# Altium PCB AX309.REV.1.0.PcbDoc (part 9 of 10)
Units mil, origin at the board's own origin, x right, y up, seen from the top; angles counter-clockwise.
Board outline 5185 x 3614 mil, 4 copper layers (Top Layer, GND, Mid-Layer 1, Bottom Layer); 191 components, 352 nets, 1106 pads, 425 vias.
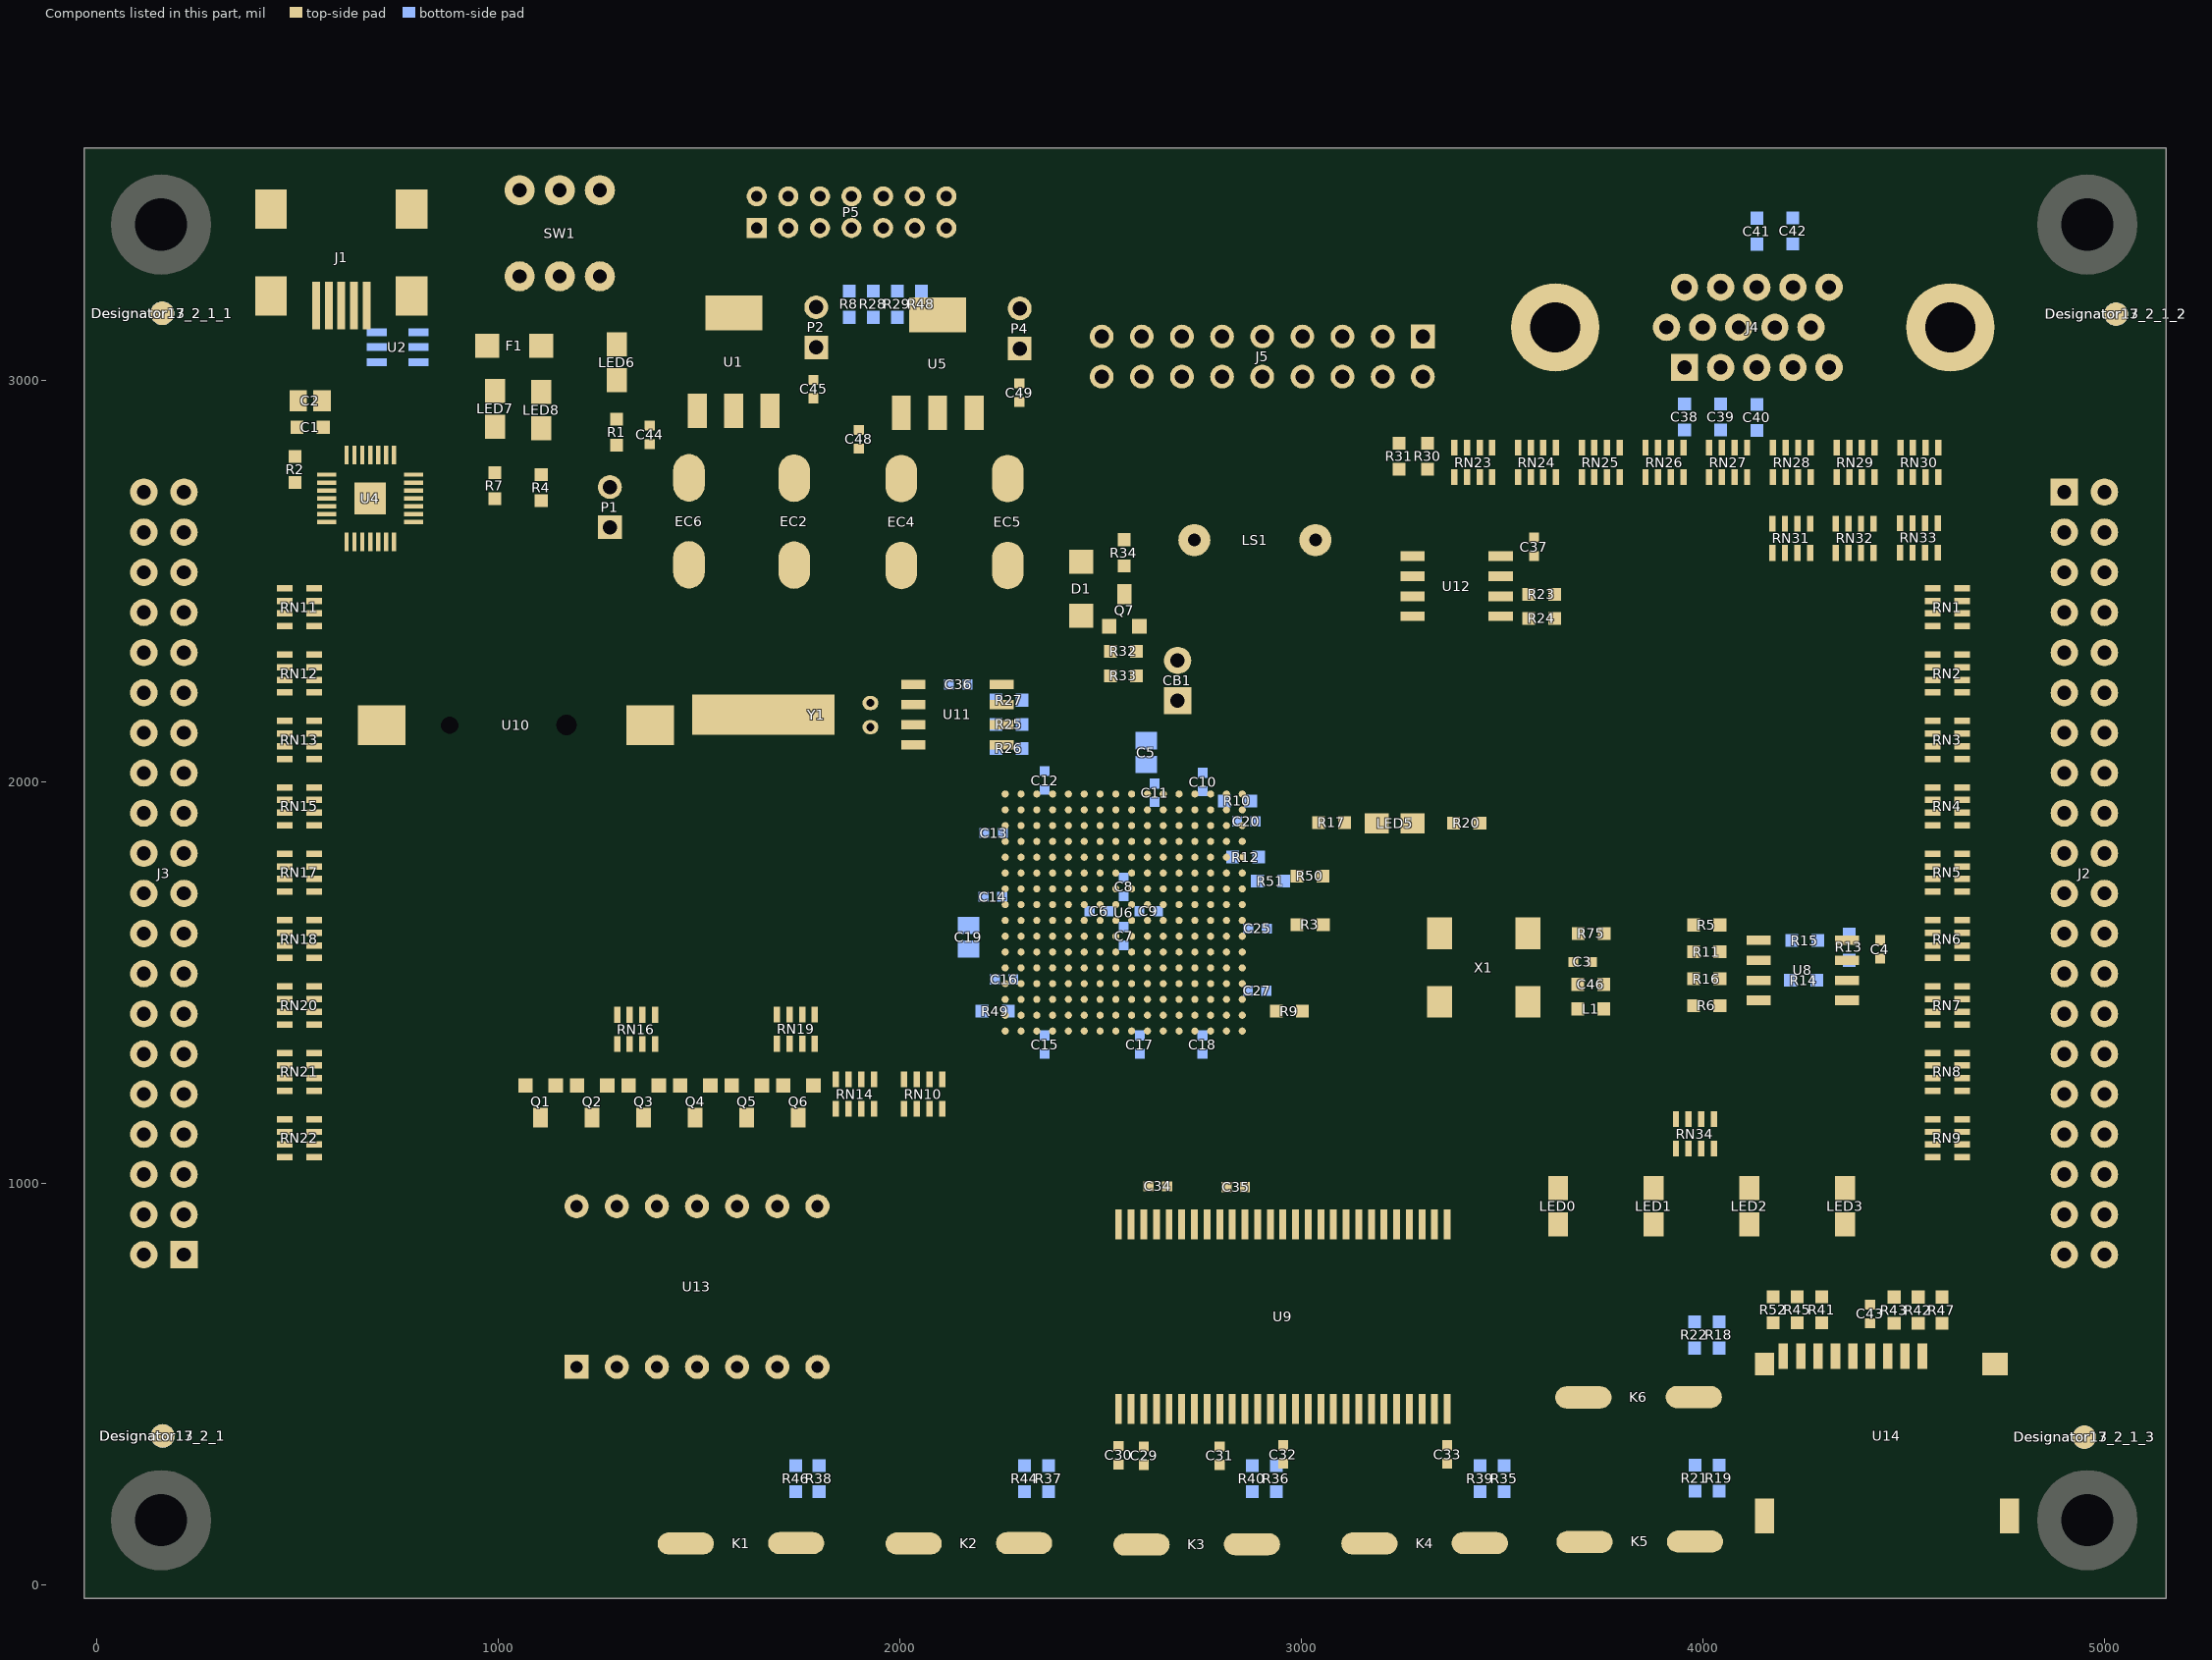
[diagram p11: the components of this part, seen from the top]

## Via types
v1: diameter 20, hole 10, Top Layer to Bottom Layer, 328 vias
v2: diameter 30, hole 15, Top Layer to Bottom Layer, 95 vias
v3: diameter 40, hole 20, Top Layer to Bottom Layer, 2 vias

## Nets (pads, with @x,y where several pads share a name; then routed paths per layer and width w, separated by ;. In a path a pad name is that pad's centre, name@x,y a point inside that pad or via, vN(x,y) a via of type N, cw(c..) or ccw(c..) an arc to the next point about the centre after c; other vN are vias at no path point) (continued)
copper on no net: (continued)
  Top Layer w0.7: 323.5,59.9 386.03,59.9 ; 323.5,60.6 386.03,60.6 ; 324.2,61.3 386.73,61.3 ; 324.2,62 387.43,62 ; 324.9,62.7 387.43,62.7 ; 324.9,63.4 388.13,63.4 ; 325.6,64.1 388.13,64.1 ; 325.6,64.8 388.83,64.8 ; 326.3,65.5 389.53,65.5 ; 326.3,66.2 389.53,66.2 ; 327,66.9 390.23,66.9 ; 327,67.6 390.93,67.6 ; 327.7,68.3 390.93,68.3 ; 327.7,69 391.63,69 ; 328.4,69.7 392.33,69.7 ; 329.1,70.4 393.03,70.4 ; 329.1,71.1 393.03,71.1 ; 329.8,71.8 393.73,71.8 ; 329.8,72.5 394.43,72.5 ; 330.5,73.2 395.13,73.2 ; 331.2,73.9 395.83,73.9 ; 331.2,74.6 395.83,74.6 ; 331.9,75.3 396.53,75.3 ; 331.9,76 397.23,76 ; 332.6,76.7 397.93,76.7 ; 333.3,77.4 398.63,77.4 ; 333.3,78.1 399.33,78.1 ; 334,78.8 400.03,78.8 ; 334.7,79.5 400.73,79.5 ; 335.4,80.2 400.73,80.2 ; 335.4,80.9 401.43,80.9 ; 336.1,81.6 402.13,81.6 ; 336.8,82.3 402.83,82.3 ; 336.8,83 403.53,83 ; 337.5,83.7 404.23,83.7 ; 338.2,84.4 404.93,84.4 ; 338.9,85.1 405.63,85.1 ; 338.9,85.8 407.03,85.8 ; 339.6,86.5 407.73,86.5 ; 340.3,87.2 408.43,87.2 ; 341,87.9 409.13,87.9 ; 341.7,88.6 409.83,88.6 ; 341.7,89.3 410.53,89.3 ; 342.4,90 411.23,90 ; 343.1,90.7 412.63,90.7 ; 343.8,91.4 413.33,91.4 ; 344.5,92.1 414.03,92.1 ; 345.2,92.8 414.73,92.8 ; 345.9,93.5 416.13,93.5 ; 345.9,94.2 416.83,94.2 ; 346.6,94.9 417.53,94.9 ; 347.3,95.6 418.93,95.6 ; 348,96.3 419.63,96.3 ; 348.7,97 421.03,97 ; 349.4,97.7 421.73,97.7 ; 350.1,98.4 423.13,98.4 ; 350.8,99.1 423.83,99.1 ; 351.5,99.8 425.23,99.8 ; 352.2,100.5 426.63,100.5 ; 352.9,101.2 427.33,101.2 ; 353.6,101.9 428.73,101.9 ; 354.3,102.6 430.13,102.6 ; 355,103.3 431.53,103.3 ; 355.7,104 432.23,104 ; 356.4,104.7 433.63,104.7 ; 357.1,105.4 435.03,105.4 ; 357.1,118.7 357.33,118.7 ; 357.8,106.1 436.43,106.1 ; 357.8,119.4 358.03,119.4 ; 357.8,120.1 359.43,120.1 ; 358.5,106.8 438.53,106.8 ; 358.5,120.8 360.13,120.8 ; 358.5,121.5 360.83,121.5 ; 359.2,122.2 361.53,122.2 ; 359.9,107.5 439.93,107.5 ; 359.9,122.9 362.23,122.9 ; 359.9,123.6 362.93,123.6 ; 360.6,108.2 441.33,108.2 ; 360.6,124.3 364.33,124.3 ; 360.6,125 365.03,125 ; 361.3,108.9 443.43,108.9 ; 361.3,125.7 365.73,125.7 ; 361.3,126.4 367.13,126.4 ; 362,109.6 444.83,109.6 ; 362,127.1 367.83,127.1 ; 362,127.8 368.53,127.8 ; 362.7,110.3 446.93,110.3 ; 362.7,128.5 369.93,128.5 ; 363.4,129.2 370.63,129.2 ; 363.4,129.9 371.33,129.9 ; 364.1,111 449.03,111 ; 364.1,130.6 372.73,130.6 ; 364.1,131.3 373.43,131.3 ; 364.8,111.7 451.13,111.7 ; 364.8,132 374.83,132 ; 364.8,132.7 375.53,132.7 ; 365.5,112.4 451.13,112.4 ; 365.5,133.4 376.93,133.4 ; 366.2,113.1 451.13,113.1 ; 366.2,134.1 377.63,134.1 ; 366.2,134.8 379.03,134.8 ; 366.9,135.5 380.43,135.5 ; 366.9,136.2 381.13,136.2 ; 367.6,113.8 451.13,113.8 ; 367.6,136.9 382.53,136.9 ; 367.6,137.6 383.93,137.6 ; 368.3,114.5 451.13,114.5 ; 368.3,138.3 384.63,138.3 ; 369,115.2 451.13,115.2 ; 369,139 386.03,139 ; 369,139.7 387.43,139.7 ; 369.7,140.4 388.83,140.4 ; 369.7,141.1 390.23,141.1 ; 370.4,115.9 451.13,115.9 ; 370.4,141.8 391.63,141.8 ; 370.4,142.5 393.03,142.5 ; 371.1,116.6 450.43,116.6 ; 371.1,143.2 394.43,143.2 ; 371.1,143.9 395.83,143.9 ; 371.8,117.3 450.43,117.3 ; 371.8,144.6 397.23,144.6 ; 372.5,145.3 399.33,145.3 ; 372.5,146 400.73,146 ; 373.2,118 450.43,118 ; 373.2,146.7 402.83,146.7 ; 373.2,147.4 404.23,147.4 ; 373.9,118.7 450.43,118.7 ; 373.9,148.1 406.33,148.1 ; 373.9,148.8 408.43,148.8 ; 374.6,149.5 409.83,149.5 ; 375.3,119.4 450.43,119.4 ; 375.3,150.2 412.63,150.2 ; 375.3,150.9 414.73,150.9 ; 376,120.1 450.43,120.1 ; 376,151.6 416.83,151.6 ; 376,152.3 419.63,152.3 ; 376.7,153 422.43,153 ; 376.7,153.7 425.23,153.7 ; 377.4,120.8 450.43,120.8 ; 377.4,154.4 428.73,154.4 ; 378.1,121.5 450.43,121.5 ; 378.1,155.1 430.83,155.1 ; 378.1,155.8 430.83,155.8 ; 378.8,156.5 431.53,156.5 ; 378.8,157.2 431.53,157.2 ; 379.5,122.2 450.43,122.2 ; 379.5,157.9 432.23,157.9 ; 379.5,158.6 432.23,158.6 ; 380.2,159.3 432.93,159.3 ; 380.2,160 432.93,160 ; 380.9,122.9 450.43,122.9 ; 380.9,160.7 432.93,160.7 ; 381.6,123.6 450.43,123.6 ; 381.6,161.4 433.63,161.4 ; 381.6,162.1 433.63,162.1 ; 382.3,162.8 434.33,162.8 ; 382.3,163.5 434.33,163.5 ; 383,124.3 450.43,124.3 ; 383,164.2 435.03,164.2 ; 383,164.9 435.03,164.9 ; 383.7,165.6 435.73,165.6 ; 384.4,125 450.43,125 ; 384.4,166.3 435.73,166.3 ; 384.4,167 436.43,167 ; 385.1,125.7 449.73,125.7 ; 385.1,167.7 436.43,167.7 ; 385.1,168.4 437.13,168.4 ; 385.8,169.1 437.13,169.1 ; 385.8,169.8 437.83,169.8 ; 386.5,126.4 449.73,126.4 ; 386.5,170.5 437.83,170.5 ; 387.2,171.2 438.53,171.2 ; 387.2,171.9 438.53,171.9 ; 387.9,127.1 449.73,127.1 ; 387.9,172.6 438.53,172.6 ; 387.9,173.3 439.23,173.3 ; 388.6,174 439.23,174 ; 388.6,174.7 439.93,174.7 ; 389.3,127.8 449.73,127.8 ; 389.3,175.4 439.93,175.4 ; 389.3,176.1 440.63,176.1 ; 390,176.8 440.63,176.8 ; 390.7,128.5 449.73,128.5 ; 390.7,177.5 441.33,177.5 ; 390.7,178.2 441.33,178.2 ; 391.4,178.9 442.03,178.9 ; 391.4,179.6 442.03,179.6 ; 392.1,129.2 449.73,129.2 ; 392.1,180.3 442.73,180.3 ; 392.1,181 442.73,181 ; 392.8,181.7 443.43,181.7 ; 393.5,129.9 449.73,129.9 ; 393.5,182.4 443.43,182.4 ; 393.5,183.1 444.13,183.1 ; 394.2,183.8 444.13,183.8 ; 394.2,184.5 444.83,184.5 ; 394.9,130.6 449.73,130.6 ; 394.9,185.2 444.83,185.2 ; 394.9,185.9 444.83,185.9 ; 395.6,186.6 445.53,186.6 ; 395.6,187.3 445.53,187.3 ; 396.3,131.3 449.73,131.3 ; 396.3,188 446.23,188 ; 397,188.7 446.23,188.7 ; 397,189.4 446.93,189.4 ; 397.7,132 449.73,132 ; 397.7,190.1 446.93,190.1 ; 397.7,190.8 447.63,190.8 ; 398.4,191.5 447.63,191.5 ; 398.4,192.2 448.33,192.2 ; 399.1,132.7 449.73,132.7 ; 399.1,192.9 448.33,192.9 ; 399.8,193.6 449.03,193.6 ; 399.8,194.3 449.03,194.3 ; 400.5,133.4 449.73,133.4 ; 400.5,195 449.73,195 ; 400.5,195.7 449.73,195.7 ; 401.2,196.4 450.43,196.4 ; 401.2,197.1 450.43,197.1 ; 401.9,197.8 497.33,197.8 ; 402.6,134.1 449.73,134.1 ; 402.6,198.5 497.33,198.5 ; 402.6,199.2 497.33,199.2 ; 403.3,199.9 497.33,199.9 ; 403.3,200.6 497.33,200.6 ; 404,134.8 449.73,134.8 ; 404,201.3 496.63,201.3 ; 404,202 496.63,202 ; 404.7,202.7 496.63,202.7 ; 404.7,203.4 496.63,203.4 ; 405.4,204.1 496.63,204.1 ; 406.1,135.5 449.03,135.5 ; 406.1,204.8 496.63,204.8 ; 406.1,205.5 495.93,205.5 ; 406.8,206.2 495.93,206.2 ; 406.8,206.9 495.93,206.9 ; 407.5,207.6 495.93,207.6 ; 407.5,208.3 495.93,208.3 ; 408.2,136.2 449.03,136.2 ; 408.2,209 495.93,209 ; 408.9,209.7 495.23,209.7 ; 408.9,210.4 495.23,210.4 ; 409.6,136.9 449.03,136.9 ; 409.6,211.1 495.23,211.1 ; 409.6,211.8 495.23,211.8 ; 410.3,212.5 495.23,212.5 ; 410.3,213.2 495.23,213.2 ; 411,213.9 494.53,213.9 ; 411.7,137.6 449.03,137.6 ; 411.7,214.6 494.53,214.6 ; 411.7,215.3 494.53,215.3 ; 412.4,216 494.53,216 ; 412.4,216.7 494.53,216.7 ; 413.1,217.4 494.53,217.4 ; 413.1,218.1 494.53,218.1 ; 413.8,138.3 449.03,138.3 ; 413.8,218.8 493.83,218.8 ; 413.8,219.5 493.83,219.5 ; 414.5,220.2 493.83,220.2 ; 415.2,220.9 493.83,220.9 ; 415.2,221.6 493.83,221.6 ; 415.9,139 449.03,139 ; 415.9,222.3 493.83,222.3 ; 415.9,223 493.13,223 ; 416.6,223.7 493.13,223.7 ; 416.6,224.4 493.13,224.4 ; 417.3,225.1 493.13,225.1 ; 418,225.8 493.13,225.8 ; 418,226.5 493.13,226.5 ; 418.7,139.7 449.03,139.7 ; 418.7,227.2 492.43,227.2 ; 418.7,227.9 492.43,227.9 ; 419.4,228.6 492.43,228.6 ; 419.4,229.3 492.43,229.3 ; 420.1,230 492.43,230 ; 420.1,230.7 492.43,230.7 ; 420.8,140.4 449.03,140.4 ; 420.8,231.4 492.43,231.4 ; 421.5,232.1 491.73,232.1 ; 421.5,232.8 491.73,232.8 ; 422.2,233.5 491.73,233.5 ; 422.2,234.2 491.73,234.2 ; 422.9,234.9 491.73,234.9 ; 422.9,235.6 491.73,235.6 ; 423.6,141.1 449.03,141.1 ; 423.6,236.3 491.03,236.3 ; 424.3,237 491.03,237 ; 424.3,237.7 491.03,237.7 ; 425,238.4 491.03,238.4 ; 425,239.1 491.03,239.1 ; 425.7,239.8 491.03,239.8 ; 425.7,240.5 490.33,240.5 ; 426.4,141.8 449.03,141.8 ; 426.4,241.2 490.33,241.2 ; 427.1,241.9 490.33,241.9 ; 427.1,242.6 490.33,242.6 ; 427.8,243.3 490.33,243.3 ; 427.8,244 490.33,244 ; 428.5,244.7 489.63,244.7 ; 428.5,245.4 489.63,245.4 ; 429.9,142.5 449.03,142.5 ; 433.4,143.2 449.03,143.2 ; 437.6,143.9 449.03,143.9 ; 442.5,144.6 448.33,144.6 ; 451.6,193.6 498.03,193.6 ; 451.6,194.3 498.03,194.3 ; 451.6,195 498.03,195 ; 451.6,195.7 498.03,195.7 ; 451.6,196.4 497.33,196.4 ; 451.6,197.1 497.33,197.1 ; 452.3,185.2 499.43,185.2 ; 452.3,185.9 499.43,185.9 ; 452.3,186.6 499.43,186.6 ; 452.3,187.3 499.43,187.3 ; 452.3,188 498.73,188 ; 452.3,188.7 498.73,188.7 ; 452.3,189.4 498.73,189.4 ; 452.3,190.1 498.73,190.1 ; 452.3,190.8 498.73,190.8 ; 452.3,191.5 498.73,191.5 ; 452.3,192.2 498.03,192.2 ; 452.3,192.9 498.03,192.9 ; 453,176.8 500.83,176.8 ; 453,177.5 500.83,177.5 ; 453,178.2 500.83,178.2 ; 453,178.9 500.13,178.9 ; 453,179.6 500.13,179.6 ; 453,180.3 500.13,180.3 ; 453,181 500.13,181 ; 453,181.7 500.13,181.7 ; 453,182.4 500.13,182.4 ; 453,183.1 499.43,183.1 ; 453,183.8 499.43,183.8 ; 453,184.5 499.43,184.5 ; 453.7,169.1 502.23,169.1 ; 453.7,169.8 502.23,169.8 ; 453.7,170.5 501.53,170.5 ; 453.7,171.2 501.53,171.2 ; 453.7,171.9 501.53,171.9 ; 453.7,172.6 501.53,172.6 ; 453.7,173.3 501.53,173.3 ; 453.7,174 501.53,174 ; 453.7,174.7 500.83,174.7 ; 453.7,175.4 500.83,175.4 ; 453.7,176.1 500.83,176.1 ; 454.4,160.7 503.63,160.7 ; 454.4,161.4 502.93,161.4 ; 454.4,162.1 502.93,162.1 ; 454.4,162.8 502.93,162.8 ; 454.4,163.5 502.93,163.5 ; 454.4,164.2 502.93,164.2 ; 454.4,164.9 502.93,164.9 ; 454.4,165.6 502.23,165.6 ; 454.4,166.3 502.23,166.3 ; 454.4,167 502.23,167 ; 454.4,167.7 502.23,167.7 ; 454.4,168.4 502.23,168.4 ; 455.1,152.3 504.33,152.3 ; 455.1,153 504.33,153 ; 455.1,153.7 504.33,153.7 ; 455.1,154.4 504.33,154.4 ; 455.1,155.1 504.33,155.1 ; 455.1,155.8 504.33,155.8 ; 455.1,156.5 504.33,156.5 ; 455.1,157.2 503.63,157.2 ; 455.1,157.9 503.63,157.9 ; 455.1,158.6 503.63,158.6 ; 455.1,159.3 503.63,159.3 ; 455.1,160 503.63,160 ; 455.8,144.6 505.73,144.6 ; 455.8,145.3 505.73,145.3 ; 455.8,146 505.73,146 ; 455.8,146.7 505.73,146.7 ; 455.8,147.4 505.73,147.4 ; 455.8,148.1 505.03,148.1 ; 455.8,148.8 505.03,148.8 ; 455.8,149.5 505.03,149.5 ; 455.8,150.2 505.03,150.2 ; 455.8,150.9 505.03,150.9 ; 455.8,151.6 505.03,151.6 ; 456.5,136.2 507.13,136.2 ; 456.5,136.9 507.13,136.9 ; 456.5,137.6 507.13,137.6 ; 456.5,138.3 507.13,138.3 ; 456.5,139 506.43,139 ; 456.5,139.7 506.43,139.7 ; 456.5,140.4 506.43,140.4 ; 456.5,141.1 506.43,141.1 ; 456.5,141.8 506.43,141.8 ; 456.5,142.5 506.43,142.5 ; 456.5,143.2 506.43,143.2 ; 456.5,143.9 505.73,143.9 ; 457.2,128.5 508.53,128.5 ; 457.2,129.2 508.53,129.2 ; 457.2,129.9 508.53,129.9 ; 457.2,130.6 507.83,130.6 ; 457.2,131.3 507.83,131.3 ; 457.2,132 507.83,132 ; 457.2,132.7 507.83,132.7 ; 457.2,133.4 507.83,133.4 ; 457.2,134.1 507.83,134.1 ; 457.2,134.8 507.13,134.8 ; 457.2,135.5 507.13,135.5 ; 457.9,120.1 509.93,120.1 ; 457.9,120.8 509.93,120.8 ; 457.9,121.5 509.23,121.5 ; 457.9,122.2 509.23,122.2 ; 457.9,122.9 509.23,122.9 ; 457.9,123.6 509.23,123.6 ; 457.9,124.3 509.23,124.3 ; 457.9,125 509.23,125 ; 457.9,125.7 509.23,125.7 ; 457.9,126.4 508.53,126.4 ; 457.9,127.1 508.53,127.1 ; 457.9,127.8 508.53,127.8 ; 458.6,112.4 511.33,112.4 ; 458.6,113.1 510.63,113.1 ; 458.6,113.8 510.63,113.8 ; 458.6,114.5 510.63,114.5 ; 458.6,115.2 510.63,115.2 ; 458.6,115.9 510.63,115.9 ; 458.6,116.6 510.63,116.6 ; 458.6,117.3 509.93,117.3 ; 458.6,118 509.93,118 ; 458.6,118.7 509.93,118.7 ; 458.6,119.4 509.93,119.4 ; 459.3,104 512.03,104 ; 459.3,104.7 512.03,104.7 ; 459.3,105.4 512.03,105.4 ; 459.3,106.1 512.03,106.1 ; 459.3,106.8 512.03,106.8 ; 459.3,107.5 512.03,107.5 ; 459.3,108.2 512.03,108.2 ; 459.3,108.9 511.33,108.9 ; 459.3,109.6 511.33,109.6 ; 459.3,110.3 511.33,110.3 ; 459.3,111 511.33,111 ; 459.3,111.7 511.33,111.7 ; 460,96.3 513.43,96.3 ; 460,97 513.43,97 ; 460,97.7 513.43,97.7 ; 460,98.4 513.43,98.4 ; 460,99.1 513.43,99.1 ; 460,99.8 512.73,99.8 ; 460,100.5 512.73,100.5 ; 460,101.2 512.73,101.2 ; 460,101.9 512.73,101.9 ; 460,102.6 512.73,102.6 ; 460,103.3 512.73,103.3 ; 460.7,87.9 514.83,87.9 ; 460.7,88.6 514.83,88.6 ; 460.7,89.3 514.83,89.3 ; 460.7,90 514.83,90 ; 460.7,90.7 514.13,90.7 ; 460.7,91.4 514.13,91.4 ; 460.7,92.1 514.13,92.1 ; 460.7,92.8 514.13,92.8 ; 460.7,93.5 514.13,93.5 ; 460.7,94.2 514.13,94.2 ; 460.7,94.9 514.13,94.9 ; 460.7,95.6 513.43,95.6 ; 461.4,80.2 516.23,80.2 ; 461.4,80.9 516.23,80.9 ; 461.4,81.6 516.23,81.6 ; 461.4,82.3 515.53,82.3 ; 461.4,83 515.53,83 ; 461.4,83.7 515.53,83.7 ; 461.4,84.4 515.53,84.4 ; 461.4,85.1 515.53,85.1 ; 461.4,85.8 515.53,85.8 ; 461.4,86.5 514.83,86.5 ; 461.4,87.2 514.83,87.2 ; 462.1,71.8 517.63,71.8 ; 462.1,72.5 517.63,72.5 ; 462.1,73.2 516.93,73.2 ; 462.1,73.9 516.93,73.9 ; 462.1,74.6 516.93,74.6 ; 462.1,75.3 516.93,75.3 ; 462.1,76 516.93,76 ; 462.1,76.7 516.93,76.7 ; 462.1,77.4 516.93,77.4 ; 462.1,78.1 516.23,78.1 ; 462.1,78.8 516.23,78.8 ; 462.1,79.5 516.23,79.5 ; 462.8,64.1 518.33,64.1 ; 462.8,64.8 518.33,64.8 ; 462.8,65.5 518.33,65.5 ; 462.8,66.2 518.33,66.2 ; 462.8,66.9 518.33,66.9 ; 462.8,67.6 518.33,67.6 ; 462.8,68.3 518.33,68.3 ; 462.8,69 517.63,69 ; 462.8,69.7 517.63,69.7 ; 462.8,70.4 517.63,70.4 ; 462.8,71.1 517.63,71.1 ; 463.5,59.9 519.03,59.9 ; 463.5,60.6 519.03,60.6 ; 463.5,61.3 519.03,61.3 ; 463.5,62 519.03,62 ; 463.5,62.7 519.03,62.7 ; 463.5,63.4 519.03,63.4 ; 558.7,59.9 708.73,59.9 ; 558.7,60.6 708.73,60.6 ; 558.7,61.3 708.73,61.3 ; 559.4,62 708.73,62 ; 559.4,62.7 708.73,62.7 ; 559.4,63.4 709.43,63.4 ; 559.4,64.1 709.43,64.1 ; 559.4,64.8 709.43,64.8 ; 560.1,65.5 709.43,65.5 ; 560.1,66.2 709.43,66.2 ; 560.1,66.9 710.13,66.9 ; 560.1,67.6 710.13,67.6 ; 560.1,68.3 710.13,68.3 ; 560.8,69 710.13,69 ; 560.8,69.7 710.13,69.7 ; 560.8,70.4 710.83,70.4 ; 560.8,71.1 710.83,71.1 ; 561.5,71.8 710.83,71.8 ; 561.5,72.5 710.83,72.5 ; 561.5,73.2 711.53,73.2 ; 561.5,73.9 711.53,73.9 ; 561.5,74.6 711.53,74.6 ; 562.2,75.3 711.53,75.3 ; 562.2,76 711.53,76 ; 562.2,76.7 712.23,76.7 ; 562.2,77.4 712.23,77.4 ; 562.2,78.1 712.23,78.1 ; 562.9,78.8 712.23,78.8 ; 562.9,79.5 712.23,79.5 ; 562.9,80.2 712.93,80.2 ; 562.9,80.9 712.93,80.9 ; 562.9,81.6 712.93,81.6 ; 563.6,82.3 712.93,82.3 ; 563.6,83 712.93,83 ; 563.6,83.7 713.63,83.7 ; 563.6,84.4 713.63,84.4 ; 564.3,85.1 713.63,85.1 ; 564.3,85.8 713.63,85.8 ; 564.3,86.5 714.33,86.5 ; 564.3,87.2 714.33,87.2 ; 564.3,87.9 714.33,87.9 ; 565,88.6 714.33,88.6 ; 565,89.3 714.33,89.3 ; 565,90 715.03,90 ; 565,90.7 715.03,90.7 ; 565,91.4 715.03,91.4 ; 565.7,92.1 715.03,92.1 ; 565.7,92.8 715.03,92.8 ; 565.7,93.5 715.73,93.5 ; 565.7,94.2 715.73,94.2 ; 566.4,94.9 715.73,94.9 ; 566.4,95.6 715.73,95.6 ; 566.4,96.3 715.73,96.3 ; 566.4,97 716.43,97 ; 566.4,97.7 716.43,97.7 ; 567.1,98.4 716.43,98.4 ; 567.1,99.1 716.43,99.1 ; 567.1,99.8 717.13,99.8 ; 567.1,100.5 717.13,100.5 ; 567.1,101.2 717.13,101.2 ; 567.8,101.9 717.13,101.9 ; 567.8,102.6 717.13,102.6 ; 567.8,103.3 717.83,103.3 ; 567.8,104 717.83,104 ; 567.8,104.7 717.83,104.7 ; 568.5,105.4 625.43,105.4 ; 568.5,106.1 625.43,106.1 ; 568.5,106.8 626.13,106.8 ; 568.5,107.5 626.13,107.5 ; 569.2,108.2 626.13,108.2 ; 569.2,108.9 626.13,108.9 ; 569.2,109.6 626.13,109.6 ; 569.2,110.3 626.83,110.3 ; 569.2,111 626.83,111 ; 569.9,111.7 626.83,111.7 ; 569.9,112.4 626.83,112.4 ; 569.9,113.1 626.83,113.1 ; 569.9,113.8 627.53,113.8 ; 569.9,114.5 627.53,114.5 ; 570.6,115.2 627.53,115.2 ; 570.6,115.9 627.53,115.9 ; 570.6,116.6 628.23,116.6 ; 570.6,117.3 628.23,117.3 ; 570.6,118 628.23,118 ; 571.3,118.7 628.23,118.7 ; 571.3,119.4 628.23,119.4 ; 571.3,120.1 628.93,120.1 ; 571.3,120.8 628.93,120.8 ; 572,121.5 628.93,121.5 ; 572,122.2 628.93,122.2 ; 572,122.9 628.93,122.9 ; 572,123.6 629.63,123.6 ; 572,124.3 629.63,124.3 ; 572.7,125 629.63,125 ; 572.7,125.7 629.63,125.7 ; 572.7,126.4 630.33,126.4 ; 572.7,127.1 630.33,127.1 ; 572.7,127.8 630.33,127.8 ; 573.4,128.5 630.33,128.5 ; 573.4,129.2 630.33,129.2 ; 573.4,129.9 631.03,129.9 ; 573.4,130.6 631.03,130.6 ; 574.1,131.3 631.03,131.3 ; 574.1,132 631.03,132 ; 574.1,132.7 631.03,132.7 ; 574.1,133.4 631.73,133.4 ; 574.1,134.1 631.73,134.1 ; 574.8,134.8 631.73,134.8 ; 574.8,135.5 631.73,135.5 ; 574.8,136.2 632.43,136.2 ; 574.8,136.9 632.43,136.9 ; 574.8,137.6 632.43,137.6 ; 575.5,138.3 632.43,138.3 ; 575.5,139 632.43,139 ; 575.5,139.7 633.13,139.7 ; 575.5,140.4 633.13,140.4 ; 576.2,141.1 633.13,141.1 ; 576.2,141.8 633.13,141.8 ; 576.2,142.5 633.13,142.5 ; 576.2,143.2 633.83,143.2 ; 576.2,143.9 633.83,143.9 ; 576.9,144.6 633.83,144.6 ; 576.9,145.3 633.83,145.3 ; 576.9,146 634.53,146 ; 576.9,146.7 634.53,146.7 ; 576.9,147.4 634.53,147.4 ; 577.6,148.1 634.53,148.1 ; 577.6,148.8 634.53,148.8 ; 577.6,149.5 635.23,149.5 ; 577.6,150.2 635.23,150.2 ; 577.6,150.9 635.23,150.9 ; 578.3,151.6 635.23,151.6 ; 578.3,152.3 635.23,152.3 ; 578.3,153 635.93,153 ; 578.3,153.7 635.93,153.7 ; 579,154.4 635.93,154.4 ; 579,155.1 635.93,155.1 ; 579,155.8 636.63,155.8 ; 579,156.5 636.63,156.5 ; 579,157.2 636.63,157.2 ; 579.7,157.9 636.63,157.9 ; 579.7,158.6 636.63,158.6 ; 579.7,159.3 637.33,159.3 ; 579.7,160 637.33,160 ; 579.7,160.7 637.33,160.7 ; 580.4,161.4 637.33,161.4 ; 580.4,162.1 637.33,162.1 ; 580.4,162.8 638.03,162.8 ; 580.4,163.5 638.03,163.5 ; 580.4,164.2 638.03,164.2 ; 581.1,164.9 638.03,164.9 ; 581.1,165.6 638.73,165.6 ; 581.1,166.3 638.73,166.3 ; 581.1,167 638.73,167 ; 581.8,167.7 638.73,167.7 ; 581.8,168.4 638.73,168.4 ; 581.8,169.1 639.43,169.1 ; 581.8,169.8 639.43,169.8 ; 581.8,170.5 639.43,170.5 ; 582.5,171.2 639.43,171.2 ; 582.5,171.9 639.43,171.9 ; 582.5,172.6 640.13,172.6 ; 582.5,173.3 640.13,173.3 ; 582.5,174 640.13,174 ; 583.2,174.7 640.13,174.7 ; 583.2,175.4 640.83,175.4 ; 583.2,176.1 640.83,176.1 ; 583.2,176.8 640.83,176.8 ; 583.9,177.5 640.83,177.5 ; 583.9,178.2 640.83,178.2 ; 583.9,178.9 641.53,178.9 ; 583.9,179.6 641.53,179.6 ; 583.9,180.3 641.53,180.3 ; 584.6,181 641.53,181 ; 584.6,181.7 641.53,181.7 ; 584.6,182.4 642.23,182.4 ; 584.6,183.1 642.23,183.1 ; 584.6,183.8 642.23,183.8 ; 585.3,184.5 642.23,184.5 ; 585.3,185.2 642.93,185.2 ; 585.3,185.9 642.93,185.9 ; 585.3,186.6 642.93,186.6 ; 586,187.3 642.93,187.3 ; 586,188 642.93,188 ; 586,188.7 643.63,188.7 ; 586,189.4 643.63,189.4 ; 586,190.1 643.63,190.1 ; 586.7,190.8 643.63,190.8 ; 586.7,191.5 643.63,191.5 ; 586.7,192.2 644.33,192.2 ; 586.7,192.9 644.33,192.9 ; 586.7,193.6 644.33,193.6 ; 587.4,194.3 644.33,194.3 ; 587.4,195 645.03,195 ; 587.4,195.7 645.03,195.7 ; 587.4,196.4 645.03,196.4 ; 587.4,197.1 645.03,197.1 ; 588.1,197.8 645.03,197.8 ; 588.1,198.5 645.73,198.5 ; 588.1,199.2 645.73,199.2 ; 588.1,199.9 645.73,199.9 ; 588.8,200.6 645.73,200.6 ; 588.8,201.3 645.73,201.3 ; 588.8,202 646.43,202 ; 588.8,202.7 646.43,202.7 ; 588.8,203.4 646.43,203.4 ; 589.5,204.1 646.43,204.1 ; 589.5,204.8 647.13,204.8 ; 589.5,205.5 647.13,205.5 ; 589.5,206.2 647.13,206.2 ; 589.5,206.9 647.13,206.9 ; 590.2,207.6 647.13,207.6 ; 590.2,208.3 647.83,208.3 ; 590.2,209 647.83,209 ; 590.2,209.7 647.83,209.7 ; 590.2,210.4 647.83,210.4 ; 590.9,211.1 647.83,211.1 ; 590.9,211.8 648.53,211.8 ; 590.9,212.5 648.53,212.5 ; 590.9,213.2 648.53,213.2 ; 591.6,213.9 648.53,213.9 ; 591.6,214.6 649.23,214.6 ; 591.6,215.3 649.23,215.3 ; 591.6,216 649.23,216 ; 591.6,216.7 649.23,216.7 ; 592.3,217.4 649.23,217.4 ; 592.3,218.1 649.93,218.1 ; 592.3,218.8 649.93,218.8 ; 592.3,219.5 649.93,219.5 ; 592.3,220.2 649.93,220.2 ; 593,220.9 649.93,220.9 ; 593,221.6 650.63,221.6 ; 593,222.3 650.63,222.3 ; 593,223 650.63,223 ; 593.7,223.7 650.63,223.7 ; 593.7,224.4 651.33,224.4 ; 593.7,225.1 651.33,225.1 ; 593.7,225.8 651.33,225.8 ; 593.7,226.5 651.33,226.5 ; 594.4,227.2 651.33,227.2 ; 594.4,227.9 652.03,227.9 ; 594.4,228.6 652.03,228.6 ; 594.4,229.3 652.03,229.3 ; 594.4,230 652.03,230 ; 595.1,230.7 652.03,230.7 ; 595.1,231.4 652.73,231.4 ; 595.1,232.1 652.73,232.1 ; 595.1,232.8 652.73,232.8 ; 595.1,233.5 652.73,233.5 ; 595.8,234.2 653.43,234.2 ; 595.8,234.9 653.43,234.9 ; 595.8,235.6 653.43,235.6 ; 595.8,236.3 653.43,236.3 ; 596.5,237 653.43,237 ; 596.5,237.7 654.13,237.7 ; 596.5,238.4 654.13,238.4 ; 596.5,239.1 654.13,239.1 ; 596.5,239.8 654.13,239.8 ; 597.2,240.5 654.83,240.5 ; 597.2,241.2 654.83,241.2 ; 597.2,241.9 654.83,241.9 ; 597.2,242.6 654.83,242.6 ; 597.2,243.3 654.83,243.3 ; 597.9,244 655.53,244 ; 597.9,244.7 655.53,244.7 ; 597.9,245.4 655.53,245.4 ; 752.6,59.9 810.23,59.9 ; 752.6,60.6 810.23,60.6 ; 752.6,61.3 810.23,61.3 ; 752.6,62 810.23,62 ; 752.6,62.7 810.93,62.7 ; 753.3,63.4 810.93,63.4 ; 753.3,64.1 810.93,64.1 ; 753.3,64.8 810.93,64.8 ; 753.3,65.5 811.63,65.5 ; 754,66.2 811.63,66.2 ; 754,66.9 811.63,66.9 ; 754,67.6 811.63,67.6 ; 754,68.3 811.63,68.3 ; 754,69 812.33,69 ; 754.7,69.7 812.33,69.7 ; 754.7,70.4 812.33,70.4 ; 754.7,71.1 812.33,71.1 ; 754.7,71.8 812.33,71.8 ; 754.7,72.5 813.03,72.5 ; 755.4,73.2 813.03,73.2 ; 755.4,73.9 813.03,73.9 ; 755.4,74.6 813.03,74.6 ; 755.4,75.3 813.73,75.3 ; 756.1,76 813.73,76 ; 756.1,76.7 813.73,76.7 ; 756.1,77.4 813.73,77.4 ; 756.1,78.1 813.73,78.1 ; 756.1,78.8 814.43,78.8 ; 756.8,79.5 814.43,79.5 ; 756.8,80.2 814.43,80.2 ; 756.8,80.9 814.43,80.9 ; 756.8,81.6 814.43,81.6 ; 756.8,82.3 815.13,82.3 ; 757.5,83 815.13,83 ; 757.5,83.7 815.13,83.7 ; 757.5,84.4 815.13,84.4 ; 757.5,85.1 815.83,85.1 ; 757.5,85.8 815.83,85.8 ; 758.2,86.5 815.83,86.5 ; 758.2,87.2 815.83,87.2 ; 758.2,87.9 815.83,87.9 ; 758.2,88.6 816.53,88.6 ; 758.9,89.3 816.53,89.3 ; 758.9,90 816.53,90 ; 758.9,90.7 816.53,90.7 ; 758.9,91.4 816.53,91.4 ; 758.9,92.1 817.23,92.1 ; 759.6,92.8 817.23,92.8 ; 759.6,93.5 817.23,93.5 ; 759.6,94.2 817.23,94.2 ; 759.6,94.9 817.93,94.9 ; 759.6,95.6 817.93,95.6 ; 760.3,96.3 817.93,96.3 ; 760.3,97 817.93,97 ; 760.3,97.7 817.93,97.7 ; 760.3,98.4 818.63,98.4 ; 761,99.1 818.63,99.1 ; 761,99.8 818.63,99.8 ; 761,100.5 818.63,100.5 ; 761,101.2 818.63,101.2 ; 761,101.9 819.33,101.9 ; 761.7,102.6 819.33,102.6 ; 761.7,103.3 819.33,103.3 ; 761.7,104 819.33,104 ; 761.7,104.7 819.33,104.7 ; 761.7,105.4 820.03,105.4 ; 762.4,106.1 820.03,106.1 ; 762.4,106.8 820.03,106.8 ; 762.4,107.5 820.03,107.5 ; 762.4,108.2 820.73,108.2 ; 763.1,108.9 820.73,108.9 ; 763.1,109.6 820.73,109.6 ; 763.1,110.3 820.73,110.3 ; 763.1,111 820.73,111 ; 763.1,111.7 821.43,111.7 ; 763.8,112.4 821.43,112.4 ; 763.8,113.1 821.43,113.1 ; 763.8,113.8 821.43,113.8 ; 763.8,114.5 821.43,114.5 ; 763.8,115.2 822.13,115.2 ; 764.5,115.9 822.13,115.9 ; 764.5,116.6 822.13,116.6 ; 764.5,117.3 822.13,117.3 ; 764.5,118 822.83,118 ; 765.2,118.7 822.83,118.7 ; 765.2,119.4 822.83,119.4 ; 765.2,120.1 822.83,120.1 ; 765.2,120.8 822.83,120.8 ; 765.2,121.5 823.53,121.5 ; 765.9,122.2 823.53,122.2 ; 765.9,122.9 823.53,122.9 ; 765.9,123.6 823.53,123.6 ; 765.9,124.3 823.53,124.3 ; 765.9,125 824.23,125 ; 766.6,125.7 824.23,125.7 ; 766.6,126.4 824.23,126.4 ; 766.6,127.1 824.23,127.1 ; 766.6,127.8 824.93,127.8 ; 767.3,128.5 824.93,128.5 ; 767.3,129.2 824.93,129.2 ; 767.3,129.9 824.93,129.9 ; 767.3,130.6 824.93,130.6 ; 767.3,131.3 825.63,131.3 ; 768,132 825.63,132 ; 768,132.7 825.63,132.7 ; 768,133.4 825.63,133.4 ; 768,134.1 826.33,134.1 ; 768,134.8 826.33,134.8 ; 768.7,135.5 826.33,135.5 ; 768.7,136.2 826.33,136.2 ; 768.7,136.9 826.33,136.9 ; 768.7,137.6 827.03,137.6 ; 769.4,138.3 827.03,138.3 ; 769.4,139 827.03,139 ; 769.4,139.7 827.03,139.7 ; 769.4,140.4 827.03,140.4 ; 769.4,141.1 827.73,141.1 ; 770.1,141.8 827.73,141.8 ; 770.1,142.5 827.73,142.5 ; 770.1,143.2 827.73,143.2 ; 770.1,143.9 828.43,143.9 ; 770.1,144.6 828.43,144.6 ; 770.8,145.3 828.43,145.3 ; 770.8,146 828.43,146 ; 770.8,146.7 828.43,146.7 ; 770.8,147.4 829.13,147.4 ; 771.5,148.1 829.13,148.1 ; 771.5,148.8 829.13,148.8 ; 771.5,149.5 829.13,149.5 ; 771.5,150.2 829.13,150.2 ; 771.5,150.9 829.83,150.9 ; 772.2,151.6 829.83,151.6 ; 772.2,152.3 829.83,152.3 ; 772.2,153 829.83,153 ; 772.2,153.7 829.83,153.7 ; 772.2,154.4 830.53,154.4 ; 772.9,155.1 830.53,155.1 ; 772.9,155.8 830.53,155.8 ; 772.9,156.5 830.53,156.5 ; 772.9,157.2 831.23,157.2 ; 773.6,157.9 831.23,157.9 ; 773.6,158.6 831.23,158.6 ; 773.6,159.3 831.23,159.3 ; 773.6,160 831.23,160 ; 773.6,160.7 831.93,160.7 ; 774.3,161.4 831.93,161.4 ; 774.3,162.1 831.93,162.1 ; 774.3,162.8 831.93,162.8 ; 774.3,163.5 831.93,163.5 ; 774.3,164.2 832.63,164.2 ; 775,164.9 832.63,164.9 ; 775,165.6 832.63,165.6 ; 775,166.3 832.63,166.3 ; 775,167 833.33,167 ; 775.7,167.7 833.33,167.7 ; 775.7,168.4 833.33,168.4 ; 775.7,169.1 833.33,169.1 ; 775.7,169.8 833.33,169.8 ; 775.7,170.5 834.03,170.5 ; 776.4,171.2 834.03,171.2 ; 776.4,171.9 834.03,171.9 ; 776.4,172.6 834.03,172.6 ; 776.4,173.3 834.73,173.3 ; 776.4,174 834.73,174 ; 777.1,174.7 834.73,174.7 ; 777.1,175.4 834.73,175.4 ; 777.1,176.1 834.73,176.1 ; 777.1,176.8 835.43,176.8 ; 777.8,177.5 835.43,177.5 ; 777.8,178.2 835.43,178.2 ; 777.8,178.9 835.43,178.9 ; 777.8,179.6 835.43,179.6 ; 777.8,180.3 836.13,180.3 ; 778.5,181 836.13,181 ; 778.5,181.7 836.13,181.7 ; 778.5,182.4 836.13,182.4 ; 778.5,183.1 836.13,183.1 ; 778.5,183.8 836.83,183.8 ; 779.2,184.5 836.83,184.5 ; 779.2,185.2 836.83,185.2 ; 779.2,185.9 836.83,185.9 ; 779.2,186.6 837.53,186.6 ; 779.9,187.3 837.53,187.3 ; 779.9,188 837.53,188 ; 779.9,188.7 837.53,188.7 ; 779.9,189.4 837.53,189.4 ; 779.9,190.1 838.23,190.1 ; 780.6,190.8 838.23,190.8 ; 780.6,191.5 838.23,191.5 ; 780.6,192.2 838.23,192.2 ; 780.6,192.9 838.23,192.9 ; 780.6,193.6 838.93,193.6 ; 781.3,194.3 838.93,194.3 ; 781.3,195 838.93,195 ; 781.3,195.7 838.93,195.7 ; 781.3,196.4 839.63,196.4 ; 782,197.1 839.63,197.1 ; 782,197.8 839.63,197.8 ; 782,198.5 839.63,198.5 ; 782,199.2 839.63,199.2 ; 782,199.9 840.33,199.9 ; 782.7,200.6 840.33,200.6 ; 782.7,201.3 840.33,201.3 ; 782.7,202 840.33,202 ; 782.7,202.7 840.33,202.7 ; 782.7,203.4 841.03,203.4 ; 783.4,204.1 841.03,204.1 ; 783.4,204.8 841.03,204.8 ; 783.4,205.5 841.03,205.5 ; 783.4,206.2 841.73,206.2 ; 784.1,206.9 841.73,206.9 ; 784.1,207.6 841.73,207.6 ; 784.1,208.3 841.73,208.3 ; 784.1,209 841.73,209 ; 784.1,209.7 842.43,209.7 ; 784.8,210.4 842.43,210.4 ; 784.8,211.1 842.43,211.1 ; 784.8,211.8 842.43,211.8 ; 784.8,212.5 843.13,212.5 ; 784.8,213.2 843.13,213.2 ; 785.5,213.9 843.13,213.9 ; 785.5,214.6 843.13,214.6 ; 785.5,215.3 843.13,215.3 ; 785.5,216 843.83,216 ; 786.2,216.7 843.83,216.7 ; 786.2,217.4 843.83,217.4 ; 786.2,218.1 843.83,218.1 ; 786.2,218.8 843.83,218.8 ; 786.2,219.5 844.53,219.5 ; 786.9,220.2 844.53,220.2 ; 786.9,220.9 844.53,220.9 ; 786.9,221.6 844.53,221.6 ; 786.9,222.3 844.53,222.3 ; 786.9,223 845.23,223 ; 787.6,223.7 845.23,223.7 ; 787.6,224.4 845.23,224.4 ; 787.6,225.1 845.23,225.1 ; 787.6,225.8 845.93,225.8 ; 788.3,226.5 845.93,226.5 ; 788.3,227.2 845.93,227.2 ; 788.3,227.9 845.93,227.9 ; 788.3,228.6 845.93,228.6 ; 788.3,229.3 846.63,229.3 ; 789,230 846.63,230 ; 789,230.7 846.63,230.7 ; 789,231.4 846.63,231.4 ; 789,232.1 846.63,232.1 ; 789,232.8 847.33,232.8 ; 789.7,233.5 847.33,233.5 ; 789.7,234.2 847.33,234.2 ; 789.7,234.9 847.33,234.9 ; 789.7,235.6 848.03,235.6 ; 790.4,236.3 848.03,236.3 ; 790.4,237 848.03,237 ; 790.4,237.7 848.03,237.7 ; 790.4,238.4 848.03,238.4 ; 790.4,239.1 848.73,239.1 ; 791.1,239.8 848.73,239.8 ; 791.1,240.5 848.73,240.5 ; 791.1,241.2 848.73,241.2 ; 791.1,241.9 848.73,241.9 ; 791.1,242.6 849.43,242.6 ; 791.8,243.3 849.43,243.3 ; 791.8,244 849.43,244 ; 791.8,244.7 849.43,244.7 ; 791.8,245.4 850.13,245.4 ; 868.1,59.9 921.53,59.9 ; 868.1,60.6 922.23,60.6 ; 868.8,61.3 922.23,61.3 ; 868.8,62 922.23,62 ; 868.8,62.7 922.23,62.7 ; 868.8,63.4 922.23,63.4 ; 868.8,64.1 922.93,64.1 ; 869.5,64.8 922.93,64.8 ; 869.5,65.5 922.93,65.5 ; 869.5,66.2 922.93,66.2 ; 869.5,66.9 923.63,66.9 ; 870.2,67.6 923.63,67.6 ; 870.2,68.3 923.63,68.3 ; 870.2,69 923.63,69 ; 870.2,69.7 923.63,69.7 ; 870.2,70.4 924.33,70.4 ; 870.9,71.1 924.33,71.1 ; 870.9,71.8 924.33,71.8 ; 870.9,72.5 924.33,72.5 ; 870.9,73.2 924.33,73.2 ; 870.9,73.9 925.03,73.9 ; 871.6,74.6 925.03,74.6 ; 871.6,75.3 925.03,75.3 ; 871.6,76 925.03,76 ; 871.6,76.7 925.73,76.7 ; 872.3,77.4 925.73,77.4 ; 872.3,78.1 925.73,78.1 ; 872.3,78.8 925.73,78.8 ; 872.3,79.5 925.73,79.5 ; 872.3,80.2 926.43,80.2 ; 873,80.9 926.43,80.9 ; 873,81.6 926.43,81.6 ; 873,82.3 926.43,82.3 ; 873,83 926.43,83 ; 873,83.7 927.13,83.7 ; 873.7,84.4 927.13,84.4 ; 873.7,85.1 927.13,85.1 ; 873.7,85.8 927.13,85.8 ; 873.7,86.5 927.83,86.5 ; 874.4,87.2 927.83,87.2 ; 874.4,87.9 927.83,87.9 ; 874.4,88.6 927.83,88.6 ; 874.4,89.3 927.83,89.3 ; 874.4,90 928.53,90 ; 875.1,90.7 928.53,90.7 ; 875.1,91.4 928.53,91.4 ; 875.1,92.1 928.53,92.1 ; 875.1,92.8 928.53,92.8 ; 875.1,93.5 929.23,93.5 ; 875.8,94.2 929.23,94.2 ; 875.8,94.9 929.23,94.9 ; 875.8,95.6 929.23,95.6 ; 875.8,96.3 929.93,96.3 ; 876.5,97 929.93,97 ; 876.5,97.7 929.93,97.7 ; 876.5,98.4 929.93,98.4 ; 876.5,99.1 929.93,99.1 ; 876.5,99.8 930.63,99.8 ; 877.2,100.5 930.63,100.5 ; 877.2,101.2 930.63,101.2 ; 877.2,101.9 930.63,101.9 ; 877.2,102.6 930.63,102.6 ; 877.2,103.3 931.33,103.3 ; 877.9,104 931.33,104 ; 877.9,104.7 931.33,104.7 ; 877.9,105.4 931.33,105.4 ; 877.9,106.1 932.03,106.1 ; 878.6,106.8 932.03,106.8 ; 878.6,107.5 932.03,107.5 ; 878.6,108.2 932.03,108.2 ; 878.6,108.9 932.03,108.9 ; 878.6,109.6 932.73,109.6 ; 879.3,110.3 932.73,110.3 ; 879.3,111 932.73,111 ; 879.3,111.7 932.73,111.7 ; 879.3,112.4 932.73,112.4 ; 880,113.1 933.43,113.1 ; 880,113.8 933.43,113.8 ; 880,114.5 933.43,114.5 ; 880,115.2 933.43,115.2 ; 880,115.9 934.13,115.9 ; 880.7,116.6 934.13,116.6 ; 880.7,117.3 934.13,117.3 ; 880.7,118 934.13,118 ; 880.7,118.7 934.13,118.7 ; 880.7,119.4 934.83,119.4 ; 881.4,120.1 934.83,120.1 ; 881.4,120.8 934.83,120.8 ; 881.4,121.5 934.83,121.5 ; 881.4,122.2 934.83,122.2 ; 882.1,122.9 935.53,122.9 ; 882.1,123.6 935.53,123.6 ; 882.1,124.3 935.53,124.3 ; 882.1,125 935.53,125 ; 882.1,125.7 935.53,125.7 ; 882.8,126.4 936.23,126.4 ; 882.8,127.1 936.23,127.1 ; 882.8,127.8 936.23,127.8 ; 882.8,128.5 936.23,128.5 ; 882.8,129.2 936.93,129.2 ; 883.5,129.9 936.93,129.9 ; 883.5,130.6 936.93,130.6 ; 883.5,131.3 936.93,131.3 ; 883.5,132 936.93,132 ; 884.2,132.7 937.63,132.7 ; 884.2,133.4 937.63,133.4 ; 884.2,134.1 937.63,134.1 ; 884.2,134.8 937.63,134.8 ; 884.2,135.5 937.63,135.5 ; 884.9,136.2 938.33,136.2 ; 884.9,136.9 938.33,136.9 ; 884.9,137.6 938.33,137.6 ; 884.9,138.3 938.33,138.3 ; 884.9,139 939.03,139 ; 885.6,139.7 939.03,139.7 ; 885.6,140.4 939.03,140.4 ; 885.6,141.1 939.03,141.1 ; 885.6,141.8 939.03,141.8 ; 886.3,142.5 939.73,142.5 ; 886.3,143.2 939.73,143.2 ; 886.3,143.9 939.73,143.9 ; 886.3,144.6 939.73,144.6 ; 886.3,145.3 939.73,145.3 ; 887,146 940.43,146 ; 887,146.7 940.43,146.7 ; 887,147.4 940.43,147.4 ; 887,148.1 940.43,148.1 ; 887,148.8 941.13,148.8 ; 887.7,149.5 941.13,149.5 ; 887.7,150.2 941.13,150.2 ; 887.7,150.9 941.13,150.9 ; 887.7,151.6 941.13,151.6 ; 888.4,152.3 941.83,152.3 ; 888.4,153 941.83,153 ; 888.4,153.7 941.83,153.7 ; 888.4,154.4 941.83,154.4 ; 888.4,155.1 941.83,155.1 ; 889.1,155.8 942.53,155.8 ; 889.1,156.5 942.53,156.5 ; 889.1,157.2 942.53,157.2 ; 889.1,157.9 942.53,157.9 ; 889.1,158.6 943.23,158.6 ; 889.8,159.3 943.23,159.3 ; 889.8,160 943.23,160 ; 889.8,160.7 943.23,160.7 ; 889.8,161.4 943.23,161.4 ; 890.5,162.1 943.93,162.1 ; 890.5,162.8 943.93,162.8 ; 890.5,163.5 943.93,163.5 ; 890.5,164.2 943.93,164.2 ; 890.5,164.9 943.93,164.9 ; 891.2,165.6 944.63,165.6 ; 891.2,166.3 944.63,166.3 ; 891.2,167 944.63,167 ; 891.2,167.7 994.33,167.7 ; 891.2,168.4 994.33,168.4 ; 891.9,169.1 993.63,169.1 ; 891.9,169.8 993.63,169.8 ; 891.9,170.5 993.63,170.5 ; 891.9,171.2 992.93,171.2 ; 892.6,171.9 992.93,171.9 ; 892.6,172.6 992.23,172.6 ; 892.6,173.3 992.23,173.3 ; 892.6,174 991.53,174 ; 892.6,174.7 991.53,174.7 ; 893.3,175.4 991.53,175.4 ; 893.3,176.1 990.83,176.1 ; 893.3,176.8 990.83,176.8 ; 893.3,177.5 990.13,177.5 ; 893.3,178.2 990.13,178.2 ; 894,178.9 989.43,178.9 ; 894,179.6 989.43,179.6 ; 894,180.3 989.43,180.3 ; 894,181 988.73,181 ; 894.7,181.7 988.73,181.7 ; 894.7,182.4 988.03,182.4 ; 894.7,183.1 988.03,183.1 ; 894.7,183.8 988.03,183.8 ; 894.7,184.5 987.33,184.5 ; 895.4,185.2 987.33,185.2 ; 895.4,185.9 986.63,185.9 ; 895.4,186.6 986.63,186.6 ; 895.4,187.3 985.93,187.3 ; 895.4,188 985.93,188 ; 896.1,188.7 985.93,188.7 ; 896.1,189.4 985.23,189.4 ; 896.1,190.1 985.23,190.1 ; 896.1,190.8 984.53,190.8 ; 896.8,191.5 984.53,191.5 ; 896.8,192.2 983.83,192.2 ; 896.8,192.9 983.83,192.9 ; 896.8,193.6 983.83,193.6 ; 896.8,194.3 983.13,194.3 ; 897.5,195 983.13,195 ; 897.5,195.7 982.43,195.7 ; 897.5,196.4 982.43,196.4 ; 897.5,197.1 981.73,197.1 ; 897.5,197.8 981.73,197.8 ; 898.2,198.5 981.73,198.5 ; 898.2,199.2 981.03,199.2 ; 898.2,199.9 981.03,199.9 ; 898.2,200.6 980.33,200.6 ; 898.9,201.3 980.33,201.3 ; 898.9,202 980.33,202 ; 898.9,202.7 979.63,202.7 ; 898.9,203.4 979.63,203.4 ; 898.9,204.1 978.93,204.1 ; 899.6,204.8 978.93,204.8 ; 899.6,205.5 978.23,205.5 ; 899.6,206.2 978.23,206.2 ; 899.6,206.9 978.23,206.9 ; 899.6,207.6 977.53,207.6 ; 900.3,208.3 977.53,208.3 ; 900.3,209 976.83,209 ; 900.3,209.7 976.83,209.7 ; 900.3,210.4 976.13,210.4 ; 901,211.1 976.13,211.1 ; 901,211.8 976.13,211.8 ; 901,212.5 975.43,212.5 ; 901,213.2 975.43,213.2 ; 901,213.9 974.73,213.9 ; 901.7,214.6 974.73,214.6 ; 901.7,215.3 974.03,215.3 ; 901.7,216 974.03,216 ; 901.7,216.7 974.03,216.7 ; 901.7,217.4 973.33,217.4 ; 902.4,218.1 973.33,218.1 ; 902.4,218.8 972.63,218.8 ; 902.4,219.5 972.63,219.5 ; 902.4,220.2 972.63,220.2 ; 903.1,220.9 971.93,220.9 ; 903.1,221.6 971.93,221.6 ; 903.1,222.3 971.23,222.3 ; 903.1,223 971.23,223 ; 903.1,223.7 970.53,223.7 ; 903.8,224.4 970.53,224.4 ; 903.8,225.1 970.53,225.1 ; 903.8,225.8 969.83,225.8 ; 903.8,226.5 969.83,226.5 ; 904.5,227.2 969.13,227.2 ; 904.5,227.9 969.13,227.9 ; 904.5,228.6 968.43,228.6 ; 904.5,229.3 968.43,229.3 ; 904.5,230 968.43,230 ; 905.2,230.7 967.73,230.7 ; 905.2,231.4 967.73,231.4 ; 905.2,232.1 967.03,232.1 ; 905.2,232.8 967.03,232.8 ; 905.2,233.5 966.33,233.5 ; 905.9,234.2 966.33,234.2 ; 905.9,234.9 966.33,234.9 ; 905.9,235.6 965.63,235.6 ; 905.9,236.3 965.63,236.3 ; 906.6,237 964.93,237 ; 906.6,237.7 964.93,237.7 ; 906.6,238.4 964.93,238.4 ; 906.6,239.1 964.23,239.1 ; 906.6,239.8 964.23,239.8 ; 907.3,240.5 963.53,240.5 ; 907.3,241.2 963.53,241.2 ; 907.3,241.9 962.83,241.9 ; 907.3,242.6 962.83,242.6 ; 907.3,243.3 962.83,243.3 ; 908,244 962.13,244 ; 908,244.7 962.13,244.7 ; 908,245.4 961.43,245.4 ; 946.5,165.6 995.73,165.6 ; 946.5,166.3 995.03,166.3 ; 946.5,167 995.03,167 ; 947.2,164.2 995.73,164.2 ; 947.2,164.9 995.73,164.9 ; 947.9,162.8 996.43,162.8 ; 947.9,163.5 996.43,163.5 ; 948.6,160.7 997.13,160.7 ; 948.6,161.4 997.13,161.4 ; 948.6,162.1 997.13,162.1 ; 949.3,159.3 997.83,159.3 ; 949.3,160 997.83,160 ; 950,157.9 998.53,157.9 ; 950,158.6 998.53,158.6 ; 950.7,155.8 999.23,155.8 ; 950.7,156.5 999.23,156.5 ; 950.7,157.2 999.23,157.2 ; 951.4,154.4 999.93,154.4 ; 951.4,155.1 999.93,155.1 ; 952.1,152.3 1001.33,152.3 ; 952.1,153 1000.63,153 ; 952.1,153.7 1000.63,153.7 ; 952.8,150.9 1001.33,150.9 ; 952.8,151.6 1001.33,151.6 ; 953.5,149.5 1002.03,149.5 ; 953.5,150.2 1002.03,150.2 ; 954.2,147.4 1002.73,147.4 ; 954.2,148.1 1002.73,148.1 ; 954.2,148.8 1002.73,148.8 ; 954.9,146 1003.43,146 ; 954.9,146.7 1003.43,146.7 ; 955.6,144.6 1004.13,144.6 ; 955.6,145.3 1004.13,145.3 ; 956.3,142.5 1004.83,142.5 ; 956.3,143.2 1004.83,143.2 ; 956.3,143.9 1004.83,143.9 ; 957,141.1 1005.53,141.1 ; 957,141.8 1005.53,141.8 ; 957.7,139.7 1006.23,139.7 ; 957.7,140.4 1006.23,140.4 ; 958.4,137.6 1006.93,137.6 ; 958.4,138.3 1006.93,138.3 ; 958.4,139 1006.93,139 ; 959.1,136.2 1062.23,136.2 ; 959.1,136.9 1062.23,136.9 ; 959.8,134.8 1061.53,134.8 ; 959.8,135.5 1061.53,135.5 ; 960.5,132.7 1061.53,132.7 ; 960.5,133.4 1061.53,133.4 ; 960.5,134.1 1061.53,134.1 ; 961.2,131.3 1060.83,131.3 ; 961.2,132 1060.83,132 ; 961.9,129.9 1060.83,129.9 ; 961.9,130.6 1060.83,130.6 ; 962.6,127.8 1060.13,127.8 ; 962.6,128.5 1060.13,128.5 ; 962.6,129.2 1060.83,129.2 ; 963.3,126.4 1060.13,126.4 ; 963.3,127.1 1060.13,127.1 ; 964,125 1059.43,125 ; 964,125.7 1059.43,125.7 ; 964.7,122.9 1059.43,122.9 ; 964.7,123.6 1059.43,123.6 ; 964.7,124.3 1059.43,124.3 ; 965.4,121.5 1058.73,121.5 ; 965.4,122.2 1058.73,122.2 ; 966.1,120.1 1058.73,120.1 ; 966.1,120.8 1058.73,120.8 ; 966.8,118 1058.03,118 ; 966.8,118.7 1058.03,118.7 ; 966.8,119.4 1058.73,119.4 ; 967.5,116.6 1058.03,116.6 ; 967.5,117.3 1058.03,117.3 ; 968.2,115.2 1057.33,115.2 ; 968.2,115.9 1057.33,115.9 ; 968.9,113.1 1057.33,113.1 ; 968.9,113.8 1057.33,113.8 ; 968.9,114.5 1057.33,114.5 ; 969.6,111.7 1056.63,111.7 ; 969.6,112.4 1056.63,112.4 ; 970.3,110.3 1056.63,110.3 ; 970.3,111 1056.63,111 ; 971,108.2 1055.93,108.2 ; 971,108.9 1055.93,108.9 ; 971,109.6 1056.63,109.6 ; 971.7,106.8 1055.93,106.8 ; 971.7,107.5 1055.93,107.5 ; 972.4,104.7 1055.23,104.7 ; 972.4,105.4 1055.23,105.4 ; 972.4,106.1 1055.23,106.1 ; 973.1,103.3 1055.23,103.3 ; 973.1,104 1055.23,104 ; 973.8,101.9 1054.53,101.9 ; 973.8,102.6 1054.53,102.6 ; 974.5,99.8 1053.83,99.8 ; 974.5,100.5 1054.53,100.5 ; 974.5,101.2 1054.53,101.2 ; 975.2,98.4 1053.83,98.4 ; 975.2,99.1 1053.83,99.1 ; 975.9,97 1053.83,97 ; 975.9,97.7 1053.83,97.7 ; 976.6,94.9 1053.13,94.9 ; 976.6,95.6 1053.13,95.6 ; 976.6,96.3 1053.13,96.3 ; 977.3,93.5 1053.13,93.5 ; 977.3,94.2 1053.13,94.2 ; 978,92.1 1052.43,92.1 ; 978,92.8 1052.43,92.8 ; 978.7,90 1052.43,90 ; 978.7,90.7 1052.43,90.7 ; 978.7,91.4 1052.43,91.4 ; 979.4,88.6 1051.73,88.6 ; 979.4,89.3 1051.73,89.3 ; 980.1,87.2 1051.73,87.2 ; 980.1,87.9 1051.73,87.9 ; 980.8,85.1 1051.03,85.1 ; 980.8,85.8 1051.03,85.8 ; 980.8,86.5 1051.03,86.5 ; 981.5,83.7 1051.03,83.7 ; 981.5,84.4 1051.03,84.4 ; 982.2,82.3 1050.33,82.3 ; 982.2,83 1050.33,83 ; 982.9,80.2 1049.63,80.2 ; 982.9,80.9 1050.33,80.9 ; 982.9,81.6 1050.33,81.6 ; 983.6,78.8 1049.63,78.8 ; 983.6,79.5 1049.63,79.5 ; 984.3,77.4 1049.63,77.4 ; 984.3,78.1 1049.63,78.1 ; 985,75.3 1048.93,75.3 ; 985,76 1048.93,76 ; 985,76.7 1048.93,76.7 ; 985.7,73.9 1048.93,73.9 ; 985.7,74.6 1048.93,74.6 ; 986.4,72.5 1048.23,72.5 ; 986.4,73.2 1048.23,73.2 ; 987.1,70.4 1047.53,70.4 ; 987.1,71.1 1048.23,71.1 ; 987.1,71.8 1048.23,71.8 ; 987.8,69 1047.53,69 ; 987.8,69.7 1047.53,69.7 ; 988.5,67.6 1047.53,67.6 ; 988.5,68.3 1047.53,68.3 ; 989.2,65.5 1046.83,65.5 ; 989.2,66.2 1046.83,66.2 ; 989.2,66.9 1046.83,66.9 ; 989.9,64.1 1046.83,64.1 ; 989.9,64.8 1046.83,64.8 ; 990.6,62 1046.13,62 ; 990.6,62.7 1046.13,62.7 ; 990.6,63.4 1046.13,63.4 ; 991.3,60.6 1045.43,60.6 ; 991.3,61.3 1046.13,61.3 ; 992,59.9 1045.43,59.9 ; 1008.8,137.6 1062.23,137.6 ; 1008.8,138.3 1062.23,138.3 ; 1008.8,139 1062.93,139 ; 1008.8,139.7 1062.93,139.7 ; 1009.5,140.4 1062.93,140.4 ; 1009.5,141.1 1062.93,141.1 ; 1009.5,141.8 1062.93,141.8 ; 1009.5,142.5 1063.63,142.5 ; 1010.2,143.2 1063.63,143.2 ; 1010.2,143.9 1063.63,143.9 ; 1010.2,144.6 1063.63,144.6 ; 1010.2,145.3 1064.33,145.3 ; 1010.2,146 1064.33,146 ; 1010.9,146.7 1064.33,146.7 ; 1010.9,147.4 1064.33,147.4 ; 1010.9,148.1 1064.33,148.1 ; 1010.9,148.8 1065.03,148.8 ; 1010.9,149.5 1065.03,149.5 ; 1011.6,150.2 1065.03,150.2 ; 1011.6,150.9 1065.03,150.9 ; 1011.6,151.6 1065.03,151.6 ; 1011.6,152.3 1065.73,152.3 ; 1011.6,153 1065.73,153 ; 1012.3,153.7 1065.73,153.7 ; 1012.3,154.4 1065.73,154.4 ; 1012.3,155.1 1065.73,155.1 ; 1012.3,155.8 1066.43,155.8 ; 1013,156.5 1066.43,156.5 ; 1013,157.2 1066.43,157.2 ; 1013,157.9 1066.43,157.9 ; 1013,158.6 1067.13,158.6 ; 1013,159.3 1067.13,159.3 ; 1013.7,160 1067.13,160 ; 1013.7,160.7 1067.13,160.7 ; 1013.7,161.4 1067.13,161.4 ; 1013.7,162.1 1067.83,162.1 ; 1014.4,162.8 1067.83,162.8 ; 1014.4,163.5 1067.83,163.5 ; 1014.4,164.2 1067.83,164.2 ; 1014.4,164.9 1067.83,164.9 ; 1014.4,165.6 1068.53,165.6 ; 1015.1,166.3 1068.53,166.3 ; 1015.1,167 1068.53,167 ; 1015.1,167.7 1068.53,167.7 ; 1015.1,168.4 1069.23,168.4 ; 1015.1,169.1 1069.23,169.1 ; 1015.8,169.8 1069.23,169.8 ; 1015.8,170.5 1069.23,170.5 ; 1015.8,171.2 1069.23,171.2 ; 1015.8,171.9 1069.93,171.9 ; 1016.5,172.6 1069.93,172.6 ; 1016.5,173.3 1069.93,173.3 ; 1016.5,174 1069.93,174 ; 1016.5,174.7 1069.93,174.7 ; 1016.5,175.4 1070.63,175.4 ; 1017.2,176.1 1070.63,176.1 ; 1017.2,176.8 1070.63,176.8 ; 1017.2,177.5 1070.63,177.5 ; 1017.2,178.2 1071.33,178.2 ; 1017.2,178.9 1071.33,178.9 ; 1017.9,179.6 1071.33,179.6 ; 1017.9,180.3 1071.33,180.3 ; 1017.9,181 1071.33,181 ; 1017.9,181.7 1072.03,181.7 ; 1018.6,182.4 1072.03,182.4 ; 1018.6,183.1 1072.03,183.1 ; 1018.6,183.8 1072.03,183.8 ; 1018.6,184.5 1072.73,184.5 ; 1018.6,185.2 1072.73,185.2 ; 1019.3,185.9 1072.73,185.9 ; 1019.3,186.6 1072.73,186.6 ; 1019.3,187.3 1072.73,187.3 ; 1019.3,188 1073.43,188 ; 1019.3,188.7 1073.43,188.7 ; 1020,189.4 1073.43,189.4 ; 1020,190.1 1073.43,190.1 ; 1020,190.8 1073.43,190.8 ; 1020,191.5 1074.13,191.5 ; 1020.7,192.2 1074.13,192.2 ; 1020.7,192.9 1074.13,192.9 ; 1020.7,193.6 1074.13,193.6 ; 1020.7,194.3 1074.83,194.3 ; 1020.7,195 1074.83,195 ; 1021.4,195.7 1074.83,195.7 ; 1021.4,196.4 1074.83,196.4 ; 1021.4,197.1 1074.83,197.1 ; 1021.4,197.8 1075.53,197.8 ; 1022.1,198.5 1075.53,198.5 ; 1022.1,199.2 1075.53,199.2 ; 1022.1,199.9 1075.53,199.9 ; 1022.1,200.6 1075.53,200.6 ; 1022.1,201.3 1076.23,201.3 ; 1022.8,202 1076.23,202 ; 1022.8,202.7 1076.23,202.7 ; 1022.8,203.4 1076.23,203.4 ; 1022.8,204.1 1076.93,204.1 ; 1022.8,204.8 1076.93,204.8 ; 1023.5,205.5 1076.93,205.5 ; 1023.5,206.2 1076.93,206.2 ; 1023.5,206.9 1076.93,206.9 ; 1023.5,207.6 1077.63,207.6 ; 1024.2,208.3 1077.63,208.3 ; 1024.2,209 1077.63,209 ; 1024.2,209.7 1077.63,209.7 ; 1024.2,210.4 1077.63,210.4 ; 1024.2,211.1 1078.33,211.1 ; 1024.9,211.8 1078.33,211.8 ; 1024.9,212.5 1078.33,212.5 ; 1024.9,213.2 1078.33,213.2 ; 1024.9,213.9 1079.03,213.9 ; 1024.9,214.6 1079.03,214.6 ; 1025.6,215.3 1079.03,215.3 ; 1025.6,216 1079.03,216 ; 1025.6,216.7 1079.03,216.7 ; 1025.6,217.4 1079.73,217.4 ; 1026.3,218.1 1079.73,218.1 ; 1026.3,218.8 1079.73,218.8 ; 1026.3,219.5 1079.73,219.5 ; 1026.3,220.2 1079.73,220.2 ; 1026.3,220.9 1080.43,220.9 ; 1027,221.6 1080.43,221.6 ; 1027,222.3 1080.43,222.3 ; 1027,223 1080.43,223 ; 1027,223.7 1081.13,223.7 ; 1027,224.4 1081.13,224.4 ; 1027.7,225.1 1081.13,225.1 ; 1027.7,225.8 1081.13,225.8 ; 1027.7,226.5 1081.13,226.5 ; 1027.7,227.2 1081.83,227.2 ; 1028.4,227.9 1081.83,227.9 ; 1028.4,228.6 1081.83,228.6 ; 1028.4,229.3 1081.83,229.3 ; 1028.4,230 1081.83,230 ; 1028.4,230.7 1082.53,230.7 ; 1029.1,231.4 1082.53,231.4 ; 1029.1,232.1 1082.53,232.1 ; 1029.1,232.8 1082.53,232.8 ; 1029.1,233.5 1083.23,233.5 ; 1029.1,234.2 1083.23,234.2 ; 1029.8,234.9 1083.23,234.9 ; 1029.8,235.6 1083.23,235.6 ; 1029.8,236.3 1083.23,236.3 ; 1029.8,237 1083.93,237 ; 1030.5,237.7 1083.93,237.7 ; 1030.5,238.4 1083.93,238.4 ; 1030.5,239.1 1083.93,239.1 ; 1030.5,239.8 1083.93,239.8 ; 1030.5,240.5 1084.63,240.5 ; 1031.2,241.2 1084.63,241.2 ; 1031.2,241.9 1084.63,241.9 ; 1031.2,242.6 1084.63,242.6 ; 1031.2,243.3 1085.33,243.3 ; 1031.2,244 1085.33,244 ; 1031.9,244.7 1085.33,244.7 ; 1031.9,245.4 1085.33,245.4 ; 1085.1,59.9 1154.63,59.9 ; 1085.8,60.6 1155.33,60.6 ; 1085.8,61.3 1156.03,61.3 ; 1086.5,62 1156.73,62 ; 1087.2,62.7 1157.43,62.7 ; 1087.9,63.4 1158.13,63.4 ; 1088.6,64.1 1158.13,64.1 ; 1089.3,64.8 1158.83,64.8 ; 1090,65.5 1159.53,65.5 ; 1090.7,66.2 1160.23,66.2 ; 1091.4,66.9 1160.93,66.9 ; 1092.1,67.6 1161.63,67.6 ; 1092.8,68.3 1162.33,68.3 ; 1093.5,69 1162.33,69 ; 1093.5,69.7 1163.03,69.7 ; 1094.2,70.4 1163.73,70.4 ; 1094.9,71.1 1164.43,71.1 ; 1095.6,71.8 1165.13,71.8 ; 1096.3,72.5 1165.83,72.5 ; 1097,73.2 1166.53,73.2 ; 1097.7,73.9 1166.53,73.9 ; 1098.4,74.6 1167.23,74.6 ; 1099.1,75.3 1167.93,75.3 ; 1099.8,76 1168.63,76 ; 1100.5,76.7 1169.33,76.7 ; 1100.5,77.4 1170.03,77.4 ; 1101.2,78.1 1170.73,78.1 ; 1101.9,78.8 1170.73,78.8 ; 1102.6,79.5 1171.43,79.5 ; 1103.3,80.2 1172.13,80.2 ; 1104,80.9 1172.83,80.9 ; 1104.7,81.6 1173.53,81.6 ; 1105.4,82.3 1174.23,82.3 ; 1106.1,83 1174.93,83 ; 1106.8,83.7 1174.93,83.7 ; 1107.5,84.4 1175.63,84.4 ; 1108.2,85.1 1176.33,85.1 ; 1108.2,85.8 1177.03,85.8 ; 1108.9,86.5 1177.73,86.5 ; 1109.6,87.2 1178.43,87.2 ; 1110.3,87.9 1179.13,87.9 ; 1111,88.6 1179.13,88.6 ; 1111.7,89.3 1179.83,89.3 ; 1112.4,90 1180.53,90 ; 1113.1,90.7 1181.23,90.7 ; 1113.8,91.4 1181.93,91.4 ; 1114.5,92.1 1182.63,92.1 ; 1115.2,92.8 1182.63,92.8 ; 1115.2,93.5 1183.33,93.5 ; 1115.9,94.2 1184.03,94.2 ; 1116.6,94.9 1184.73,94.9 ; 1117.3,95.6 1185.43,95.6 ; 1118,96.3 1186.13,96.3 ; 1118.7,97 1186.83,97 ; 1119.4,97.7 1187.53,97.7 ; 1120.1,98.4 1187.53,98.4 ; 1120.8,99.1 1188.23,99.1 ; 1121.5,99.8 1188.93,99.8 ; 1122.2,100.5 1189.63,100.5 ; 1122.2,101.2 1190.33,101.2 ; 1122.9,101.9 1191.03,101.9 ; 1123.6,102.6 1191.73,102.6 ; 1124.3,103.3 1191.73,103.3 ; 1125,104 1192.43,104 ; 1125.7,104.7 1193.13,104.7 ; 1125.7,244.7 1184.73,244.7 ; 1125.7,245.4 1184.73,245.4 ; 1126.4,105.4 1193.83,105.4 ; 1126.4,243.3 1185.43,243.3 ; 1126.4,244 1185.43,244 ; 1127.1,106.1 1194.53,106.1 ; 1127.1,242.6 1186.13,242.6 ; 1127.8,106.8 1195.23,106.8 ; 1127.8,241.2 1186.83,241.2 ; 1127.8,241.9 1186.13,241.9 ; 1128.5,107.5 1195.23,107.5 ; 1128.5,239.8 1187.53,239.8 ; 1128.5,240.5 1186.83,240.5 ; 1129.2,108.2 1195.93,108.2 ; 1129.2,238.4 1188.23,238.4 ; 1129.2,239.1 1187.53,239.1 ; 1129.9,108.9 1196.63,108.9 ; 1129.9,109.6 1197.33,109.6 ; 1129.9,237.7 1188.93,237.7 ; 1130.6,110.3 1198.03,110.3 ; 1130.6,236.3 1189.63,236.3 ; 1130.6,237 1188.93,237 ; 1131.3,111 1198.73,111 ; 1131.3,234.9 1190.33,234.9 ; 1131.3,235.6 1189.63,235.6 ; 1132,111.7 1198.73,111.7 ; 1132,233.5 1191.03,233.5 ; 1132,234.2 1190.33,234.2 ; 1132.7,112.4 1198.73,112.4 ; 1132.7,232.8 1191.03,232.8 ; 1133.4,113.1 1198.03,113.1 ; 1133.4,231.4 1191.73,231.4 ; 1133.4,232.1 1191.73,232.1 ; 1134.1,113.8 1198.03,113.8 ; 1134.1,230 1192.43,230 ; 1134.1,230.7 1192.43,230.7 ; 1134.8,114.5 1197.33,114.5 ; 1134.8,228.6 1193.13,228.6 ; 1134.8,229.3 1193.13,229.3 ; 1135.5,115.2 1197.33,115.2 ; 1135.5,227.9 1193.83,227.9 ; 1136.2,115.9 1196.63,115.9 ; 1136.2,226.5 1194.53,226.5 ; 1136.2,227.2 1193.83,227.2 ; 1136.9,116.6 1196.63,116.6 ; 1136.9,117.3 1195.93,117.3 ; 1136.9,225.1 1195.23,225.1 ; 1136.9,225.8 1194.53,225.8 ; 1137.6,118 1195.93,118 ; 1137.6,223.7 1195.93,223.7 ; 1137.6,224.4 1195.23,224.4 ; 1138.3,118.7 1195.23,118.7 ; 1138.3,222.3 1196.63,222.3 ; 1138.3,223 1195.93,223 ; 1139,119.4 1195.23,119.4 ; 1139,221.6 1196.63,221.6 ; 1139.7,120.1 1194.53,120.1 ; 1139.7,220.2 1197.33,220.2 ; 1139.7,220.9 1197.33,220.9 ; 1140.4,120.8 1194.53,120.8 ; 1140.4,218.8 1198.03,218.8 ; 1140.4,219.5 1198.03,219.5 ; 1141.1,121.5 1193.83,121.5 ; 1141.1,217.4 1198.73,217.4 ; 1141.1,218.1 1198.73,218.1 ; 1141.8,122.2 1193.83,122.2 ; 1141.8,216.7 1199.43,216.7 ; 1142.5,122.9 1193.13,122.9 ; 1142.5,215.3 1200.13,215.3 ; 1142.5,216 1199.43,216 ; 1143.2,123.6 1193.13,123.6 ; 1143.2,213.9 1200.83,213.9 ; 1143.2,214.6 1200.83,214.6 ; 1143.9,124.3 1192.43,124.3 ; 1143.9,212.5 1201.53,212.5 ; 1143.9,213.2 1201.53,213.2 ; 1144.6,125 1191.73,125 ; 1144.6,125.7 1191.73,125.7 ; 1144.6,211.8 1202.23,211.8 ; 1145.3,126.4 1191.03,126.4 ; 1145.3,210.4 1202.93,210.4 ; 1145.3,211.1 1202.23,211.1 ; 1146,127.1 1191.03,127.1 ; 1146,209 1203.63,209 ; 1146,209.7 1202.93,209.7 ; 1146.7,127.8 1190.33,127.8 ; 1146.7,207.6 1204.33,207.6 ; 1146.7,208.3 1203.63,208.3 ; 1147.4,128.5 1190.33,128.5 ; 1147.4,206.9 1204.33,206.9 ; 1148.1,129.2 1189.63,129.2 ; 1148.1,205.5 1205.03,205.5 ; 1148.1,206.2 1205.03,206.2 ; 1148.8,129.9 1189.63,129.9 ; 1148.8,204.1 1205.73,204.1 ; 1148.8,204.8 1205.73,204.8 ; 1149.5,130.6 1188.93,130.6 ; 1149.5,202.7 1206.43,202.7 ; 1149.5,203.4 1206.43,203.4 ; 1150.2,131.3 1188.93,131.3 ; 1150.2,201.3 1207.13,201.3 ; 1150.2,202 1207.13,202 ; 1150.9,132 1188.23,132 ; 1150.9,200.6 1207.83,200.6 ; 1151.6,132.7 1188.23,132.7 ; 1151.6,133.4 1187.53,133.4 ; 1151.6,199.2 1208.53,199.2 ; 1151.6,199.9 1207.83,199.9 ; 1152.3,134.1 1187.53,134.1 ; 1152.3,197.8 1209.23,197.8 ; 1152.3,198.5 1208.53,198.5 ; 1153,134.8 1186.83,134.8 ; 1153,196.4 1209.93,196.4 ; 1153,197.1 1209.23,197.1 ; 1153.7,135.5 1186.83,135.5 ; 1153.7,195.7 1209.93,195.7 ; 1154.4,136.2 1186.13,136.2 ; 1154.4,194.3 1210.63,194.3 ; 1154.4,195 1210.63,195 ; 1155.1,136.9 1186.13,136.9 ; 1155.1,192.9 1209.93,192.9 ; 1155.1,193.6 1210.63,193.6 ; 1155.8,137.6 1185.43,137.6 ; 1155.8,191.5 1208.53,191.5 ; 1155.8,192.2 1209.23,192.2 ; 1156.5,138.3 1185.43,138.3 ; 1156.5,190.8 1207.83,190.8 ; 1157.2,139 1184.73,139 ; 1157.2,189.4 1206.43,189.4 ; 1157.2,190.1 1207.13,190.1 ; 1157.9,139.7 1184.03,139.7 ; 1157.9,188 1205.03,188 ; 1157.9,188.7 1205.73,188.7 ; 1158.6,140.4 1184.03,140.4 ; 1158.6,186.6 1203.63,186.6 ; 1158.6,187.3 1204.33,187.3 ; 1159.3,141.1 1183.33,141.1 ; 1159.3,141.8 1183.33,141.8 ; 1159.3,185.9 1202.93,185.9 ; 1160,142.5 1182.63,142.5 ; 1160,184.5 1201.53,184.5 ; 1160,185.2 1202.23,185.2